# EAGLE board portal (EAGLE 9.6.2)
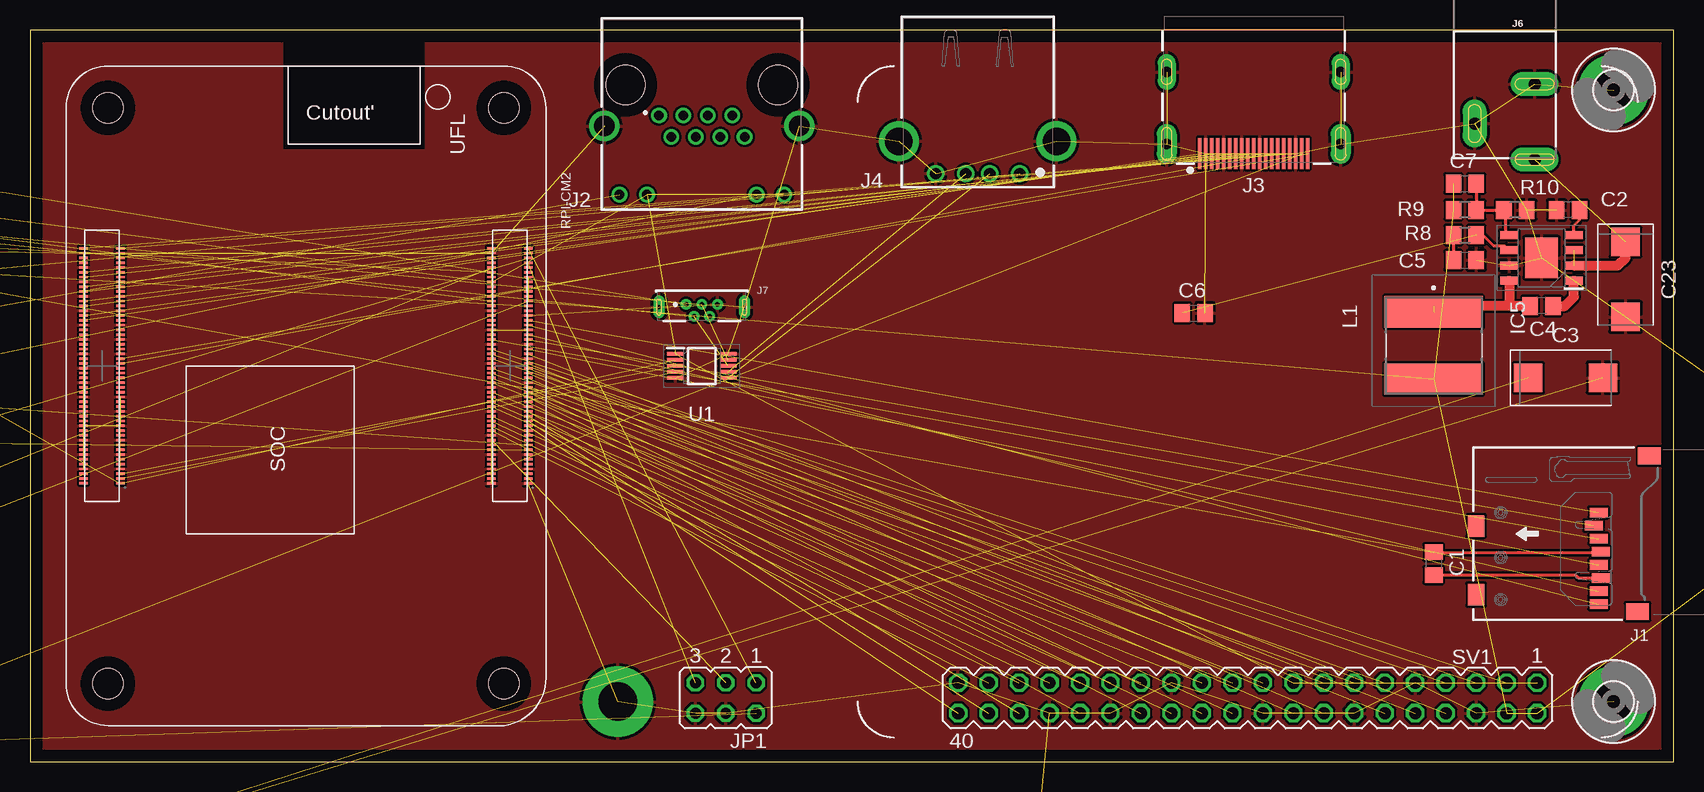
[diagram p0: board, top side]
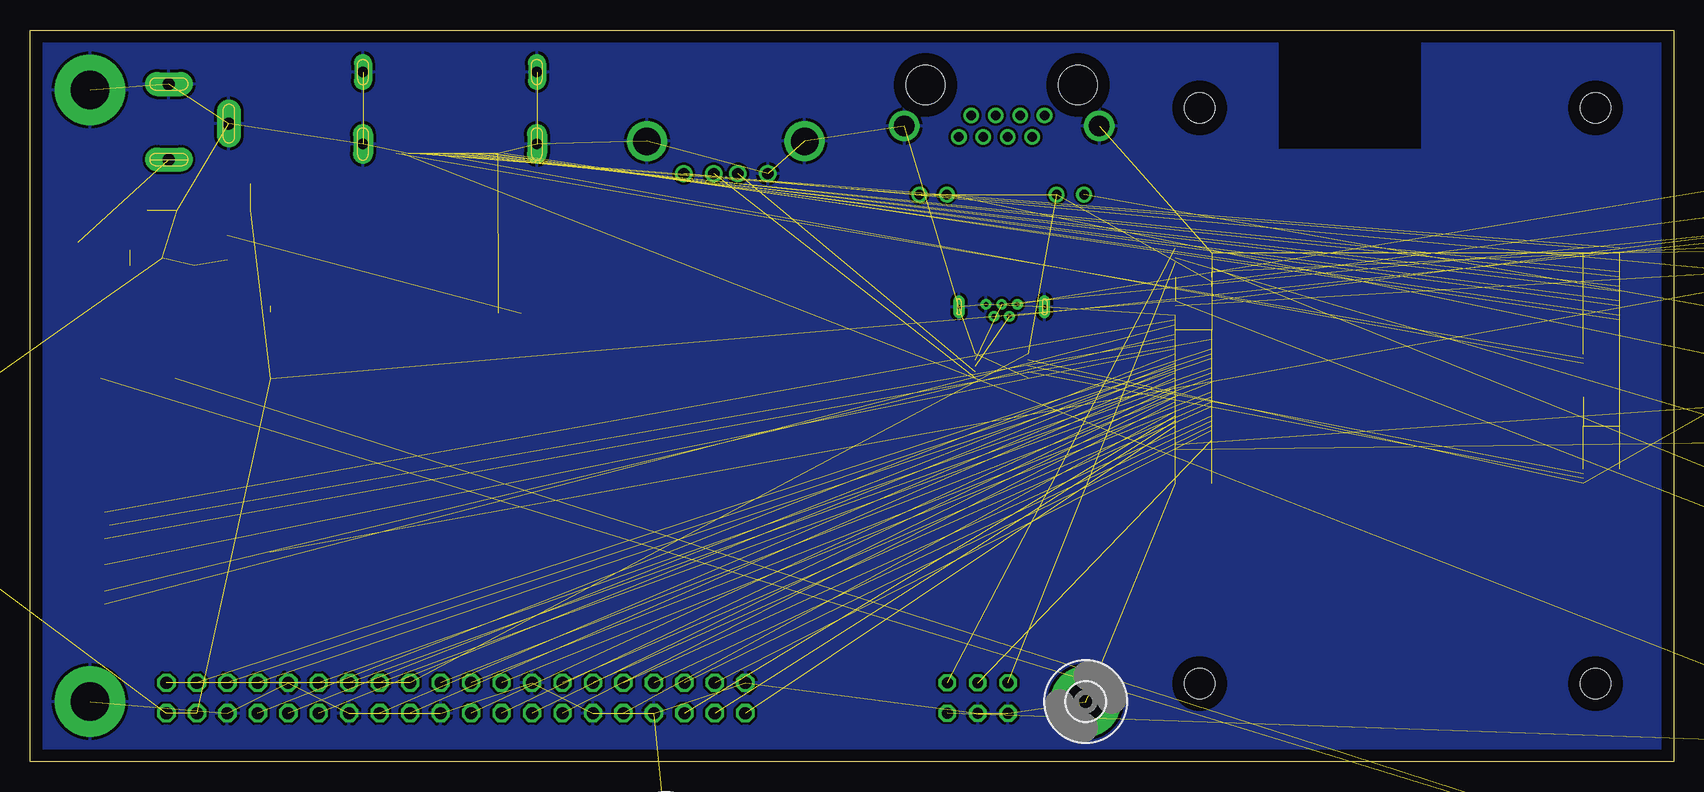
[diagram p1: board, bottom side, seen from below]

Size 137 x 61 mm. Coordinates in mm from the lower left corner, seen from the top.
Outline: 0,0 137,0 137,61 0,61 0,0
Copper layers (1*16): Top 0.035mm / dielectric 1.5mm / Bottom 0.035mm
Design rules "default *": minimum track width 8mil, minimum drill 0.35mm, track to track 8mil, track to pad 6mil, pad to pad 5mil, via to via 6mil, smd to smd 6mil, copper to edge 40mil, drill to drill 6mil, minimum pad ring 10mil, minimum via ring 8mil, stop-mask expansion 4mil, vias tented up to drill 0mil, thermal gap 10mil

## Footprints (pad centres in the part's own frame; a part is rotated, then mirrored left to right if it is on the bottom)
C0805 = smd 1.3 x 1.5: 1 -0.95,0; 2 0.95,0
CAPMP7343X310N = smd 2.368 x 2.404: 1 -3.121,0; 2 3.121,0
3,2-PAD = drill 3.2 pad 5.842: B3,2 0,0
SOT94P280X100-5N = smd 1.25 x 0.65: 1 -1.25,0.94; 2 -1.25,0; 3 -1.25,-0.94; 4 1.25,-0.94; 5 1.25,0.94
GHI-IC_SC70(TI-DCK) = smd 0.4 x 0.9: 1 0.65,1.1; 2 0,1.1; 3 -0.65,1.1; 4 -0.65,-1.1; 5 0.65,-1.1
DQA(R-PUSON-N10) = smd 0.3 x 0.55: 1 -1,-0.385; 2 -0.5,-0.385; 4 0.5,-0.385; 5 1,-0.385; 6 1,0.385; 7 0.5,0.385; 9 -0.5,0.385; 10 -1,0.385 | smd 0.4 x 0.55: 3 0,-0.385; 8 0,0.385
SOIC127P600X163-9N = smd 1.5 x 0.65: 1 -2.7,1.905; 2 -2.7,0.635; 3 -2.7,-0.635; 4 -2.7,-1.905; 5 2.7,-1.905; 6 2.7,-0.635; 7 2.7,0.635; 8 2.7,1.905 | smd 2.71 x 3.35: 9 0,0
SOT95P280X145-6N = smd 1.15 x 0.6: 1 -1.25,0.95; 2 -1.25,0; 3 -1.25,-0.95; 4 1.25,-0.95; 5 1.25,0; 6 1.25,0.95
A0R-JMP = smd 1.5 x 1.3: 1 0,1.7; 2 0,0; 3 0,-1.7
CON-SD-CARD_2908-05 = smd 0.8 x 1.5: 1 1.761,3.847; 2 0.669,4.253; 3 -0.423,3.847; 4 -1.515,3.644; 5 -2.607,3.847; 6 -3.7,3.644; 7 -4.792,3.847; 8 -5.884,3.847 | smd 1.397 x 1.905: GND@1 -6.5,0.6; GND@2 6.473,-0.389 | smd 1.803 x 1.397: GND@3 0.631,14.059; GND@4 -5.084,14.059
615008137421 = drill 0.8: 1 3.57,0.125; 2 2.55,1.905; 3 1.53,0.125; 4 0.51,1.905; 5 -0.51,0.125; 6 -1.53,1.905; 7 -2.55,0.125; 8 -3.57,1.905; 9 6.86,6.725; 10 4.57,6.725; 11 -4.57,6.725; 12 -6.86,6.725 | drill 1.7: S1 -8.125,1.015; S2 8.125,1.015 | hole 3.25: -6.35,-2.415; 6.35,-2.415
685119134923 = smd 0.28 x 2.6: 1 4.5,0; 2 4,0; 3 3.5,0; 4 3,0; 5 2.5,0; 6 2,0; 7 1.5,0; 8 1,0; 9 0.5,0; 10 0,0; 11 -0.5,0; 12 -1,0; 13 -1.5,0; 14 -2,0; 15 -2.5,0; 16 -3,0; 17 -3.5,0; 18 -4,0; 19 -4.5,0 | drill 0.9 pad 1.65 long: SHELL -7.25,-0.8; SHELL1 7.25,-0.8 | drill 0.9 pad 1.5 long: SHELL2 -7.25,-6.8; SHELL3 7.25,-6.8
61400416021 = drill 0.92: 1 -3.5,5.99; 2 -1,5.99; 3 1,5.99; 4 3.5,5.99 | drill 2.3: S1 -6.57,3.28; S2 6.57,3.28
POWER_JACK_SLOT = drill 1 pad 2 long: GND@1 2.58,7.5; GND@2 7.58,10.8; PWR 2.58,13.8
614105150721 = drill 0.4: 1 -1.3,0.125; 2 -0.65,-0.875; 3 0,0.125; 4 0.65,-0.875; 5 1.3,0.125 | drill 0.35 pad 0.97 long: S1 -3.575,-0.095; S2 3.575,-0.095
JP3Q = drill 0.914 octagon: 1 -2.54,-1.27; 2 -2.54,1.27; 3 0,-1.27; 4 0,1.27; 5 2.54,-1.27; 6 2.54,1.27
SRN80408R2Y = smd 2.6 x 8.2: 1 -2.8,0; 2 2.8,0
CHIP-LED0805 = smd 1.2 x 1.2: A 0,-1.05; C 0,1.05
R0805 = smd 1.3 x 1.5: 1 -0.95,0; 2 0.95,0
RPI-CM4 = smd 0.2 x 0.7: 1 34.8,38.54; 2 34.8,35.46; 3 34.4,38.54; 4 34.4,35.46; 5 34,38.54; 6 34,35.46; 7 33.6,38.54; 8 33.6,35.46; 9 33.2,38.54; 10 33.2,35.46; 11 32.8,38.54; 12 32.8,35.46; 13 32.4,38.54; 14 32.4,35.46; 15 32,38.54; 16 32,35.46; 17 31.6,38.54; 18 31.6,35.46; 19 31.2,38.54; 20 31.2,35.46; 21 30.8,38.54; 22 30.8,35.46; 23 30.4,38.54; 24 30.4,35.46; 25 30,38.54; 26 30,35.46; 27 29.6,38.54; 28 29.6,35.46; 29 29.2,38.54; 30 29.2,35.46; 31 28.8,38.54; 32 28.8,35.46; 33 28.4,38.54; 34 28.4,35.46; 35 28,38.54; 36 28,35.46; 37 27.6,38.54; 38 27.6,35.46; 39 27.2,38.54; 40 27.2,35.46; 41 26.8,38.54; 42 26.8,35.46; 43 26.4,38.54; 44 26.4,35.46; 45 26,38.54; 46 26,35.46; 47 25.6,38.54; 48 25.6,35.46; 49 25.2,38.54; 50 25.2,35.46; 51 24.8,38.54; 52 24.8,35.46; 53 24.4,38.54; 54 24.4,35.46; 55 24,38.54; 56 24,35.46; 57 23.6,38.54; 58 23.6,35.46; 59 23.2,38.54; 60 23.2,35.46; 61 22.8,38.54; 62 22.8,35.46; 63 22.4,38.54; 64 22.4,35.46; 65 22,38.54; 66 22,35.46; 67 21.6,38.54; 68 21.6,35.46; 69 21.2,38.54; 70 21.2,35.46; 71 20.8,38.54; 72 20.8,35.46; 73 20.4,38.54; 74 20.4,35.46; 75 20,38.54; 76 20,35.46; 77 19.6,38.54; 78 19.6,35.46; 79 19.2,38.54; 80 19.2,35.46; 81 18.8,38.54; 82 18.8,35.46; 83 18.4,38.54; 84 18.4,35.46; 85 18,38.54; 86 18,35.46; 87 17.6,38.54; 88 17.6,35.46; 89 17.2,38.54; 90 17.2,35.46; 91 16.8,38.54; 92 16.8,35.46; 93 16.4,38.54; 94 16.4,35.46; 95 16,38.54; 96 16,35.46; 97 15.6,38.54; 98 15.6,35.46; 99 15.2,38.54; 100 15.2,35.46; 101 34.8,4.54; 102 34.8,1.46; 103 34.4,4.54; 104 34.4,1.46; 105 34,4.54; 106 34,1.46; 107 33.6,4.54; 108 33.6,1.46; 109 33.2,4.54; 110 33.2,1.46; 111 32.8,4.54; 112 32.8,1.46; 113 32.4,4.54; 114 32.4,1.46; 115 32,4.54; 116 32,1.46; 117 31.6,4.54; 118 31.6,1.46; 119 31.2,4.54; 120 31.2,1.46; 121 30.8,4.54; 122 30.8,1.46; 123 30.4,4.54; 124 30.4,1.46; 125 30,4.54; 126 30,1.46; 127 29.6,4.54; 128 29.6,1.46; 129 29.2,4.54; 130 29.2,1.46; 131 28.8,4.54; 132 28.8,1.46; 133 28.4,4.54; 134 28.4,1.46; 135 28,4.54; 136 28,1.46; 137 27.6,4.54; 138 27.6,1.46; 139 27.2,4.54; 140 27.2,1.46; 141 26.8,4.54; 142 26.8,1.46; 143 26.4,4.54; 144 26.4,1.46; 145 26,4.54; 146 26,1.46; 147 25.6,4.54; 148 25.6,1.46; 149 25.2,4.54; 150 25.2,1.46; 151 24.8,4.54; 152 24.8,1.46; 153 24.4,4.54; 154 24.4,1.46; 155 24,4.54; 156 24,1.46; 157 23.6,4.54; 158 23.6,1.46; 159 23.2,4.54; 160 23.2,1.46; 161 22.8,4.54; 162 22.8,1.46; 163 22.4,4.54; 164 22.4,1.46; 165 22,4.54; 166 22,1.46; 167 21.6,4.54; 168 21.6,1.46; 169 21.2,4.54; 170 21.2,1.46; 171 20.8,4.54; 172 20.8,1.46; 173 20.4,4.54; 174 20.4,1.46; 175 20,4.54; 176 20,1.46; 177 19.6,4.54; 178 19.6,1.46; 179 19.2,4.54; 180 19.2,1.46; 181 18.8,4.54; 182 18.8,1.46; 183 18.4,4.54; 184 18.4,1.46; 185 18,4.54; 186 18,1.46; 187 17.6,4.54; 188 17.6,1.46; 189 17.2,4.54; 190 17.2,1.46; 191 16.8,4.54; 192 16.8,1.46; 193 16.4,4.54; 194 16.4,1.46; 195 16,4.54; 196 16,1.46; 197 15.6,4.54; 198 15.6,1.46; 199 15.2,4.54; 200 15.2,1.46 | hole 2.55: 3.5,3.5; 3.5,36.5; 51.5,36.5; 51.5,3.5
MA20-2 = drill 1.016 octagon: 1 -24.13,-1.27; 2 -24.13,1.27; 3 -21.59,-1.27; 4 -21.59,1.27; 5 -19.05,-1.27; 6 -19.05,1.27; 7 -16.51,-1.27; 8 -16.51,1.27; 9 -13.97,-1.27; 10 -13.97,1.27; 11 -11.43,-1.27; 12 -11.43,1.27; 13 -8.89,-1.27; 14 -8.89,1.27; 15 -6.35,-1.27; 16 -6.35,1.27; 17 -3.81,-1.27; 18 -3.81,1.27; 19 -1.27,-1.27; 20 -1.27,1.27; 21 1.27,-1.27; 22 1.27,1.27; 23 3.81,-1.27; 24 3.81,1.27; 25 6.35,-1.27; 26 6.35,1.27; 27 8.89,-1.27; 28 8.89,1.27; 29 11.43,-1.27; 30 11.43,1.27; 31 13.97,-1.27; 32 13.97,1.27; 33 16.51,-1.27; 34 16.51,1.27; 35 19.05,-1.27; 36 19.05,1.27; 37 21.59,-1.27; 38 21.59,1.27; 39 24.13,-1.27; 40 24.13,1.27
SOP50P490X110-10N = smd 1.4 x 0.3: 1 -2.2,1; 2 -2.2,0.5; 3 -2.2,0; 4 -2.2,-0.5; 5 -2.2,-1; 6 2.2,-1; 7 2.2,-0.5; 8 2.2,0; 9 2.2,0.5; 10 2.2,1

## Placement (x,y rotation side)
C1  10u  [C0805]  117,16.5 270 top
C2  10n  [C0805]  128.2,46 180 top
C3  10u 30v  [CAPMP7343X310N]  128,32 0 top
C4  100n  [C0805]  126,38 180 top
C5  2.7n  [C0805]  119.6,41.8 0 top
C6  33p  [C0805]  97,37.4 0 top
C7  33p  [C0805]  119.6,48.2 0 top
C8  22u  [C0805]  152,23 0 top  (outside the outline)
C9  22u  [C0805]  157,23 0 top  (outside the outline)
C10  22u  [C0805]  158,30 0 top  (outside the outline)
C11  10u  [C0805]  -73,28 0 top  (outside the outline)
C12  10u  [C0805]  -78,35 0 top  (outside the outline)
C13  10u  [C0805]  -73,35 0 top  (outside the outline)
C14  10u  [C0805]  -68,35 0 top  (outside the outline)
C15  100u  [CAPMP7343X310N]  -75,43 0 top  (outside the outline)
C16  10u  [C0805]  -78,28 0 top  (outside the outline)
C17  10u  [C0805]  -78,-18 0 top  (outside the outline)
C18  10u  [C0805]  -73,-18 0 top  (outside the outline)
C19  10u  [C0805]  -68,-18 0 top  (outside the outline)
C20  10u  [C0805]  -78,-25 0 top  (outside the outline)
C21  100u  [CAPMP7343X310N]  -75,-10 0 top  (outside the outline)
C22  10u  [C0805]  -73,-25 0 top  (outside the outline)
C23  10u 30v  [CAPMP7343X310N]  133,40.2 270 top
H1  MOUNT-PAD-ROUND3.2  [3,2-PAD]  84,-6 0 bottom  (outside the outline)
H2  MOUNT-PAD-ROUND3.2  [3,2-PAD]  49,5 0 bottom
H3  MOUNT-PAD-ROUND3.2  [3,2-PAD]  132,56 0 top
H4  MOUNT-PAD-ROUND3.2  [3,2-PAD]  132,5 0 top
IC1  RT9742GGJ5  [SOT94P280X100-5N]  -28,43 0 top  (outside the outline)
IC2  [GHI-IC_SC70(TI-DCK)]  -35,19 90 top  (outside the outline)
IC3  [GHI-IC_SC70(TI-DCK)]  -58,1 0 top  (outside the outline)
IC4  TPD4EUSB30DQAR  [DQA(R-PUSON-N10)]  -82,52 0 top  (outside the outline)
IC5  AP64501SP-13  [SOIC127P600X163-9N]  126,42 180 top
IC6  AP22653W6-7  [SOT95P280X145-6N]  -74,23 0 top  (outside the outline)
IC7  AP22653W6-7  [SOT95P280X145-6N]  -73,-31 0 top  (outside the outline)
IOREF  0R-JUMPA  [A0R-JMP]  -13,45 0 top  (outside the outline)
J1  CON-SD-CARD_MICROSD-2908-05  [CON-SD-CARD_2908-05]  134.6,19 90 top
J2  615008137421  [615008137421]  56,54 180 top
J3  [685119134923]  102,50.7 180 top
J4  61400416021  [61400416021]  79,55 180 top
J6  POWER_JACKSLT  [POWER_JACK_SLOT]  128,64 180 top
J7  614105150721  [614105150721]  56,38 0 top
JP1  [JP3Q]  58,5.3 180 top
L1  SRN8040-3R6Y  [SRN80408R2Y]  117,34.7 270 top
LED1  Green  [CHIP-LED0805]  -43,19 0 top  (outside the outline)
LED2  Red  [CHIP-LED0805]  -50,19 0 top  (outside the outline)
R1  12k  [R0805]  -37,39 0 top  (outside the outline)
R2  470  [R0805]  -37,32 0 top  (outside the outline)
R3  470  [R0805]  -37,27 0 top  (outside the outline)
R4  1k  [R0805]  -51,13 0 top  (outside the outline)
R5  1k  [R0805]  -51,8 0 top  (outside the outline)
R6  2.2k  [R0805]  -67,65 0 top  (outside the outline)
R7  2.2k  [R0805]  -67,58 0 top  (outside the outline)
R8  15.8k  [R0805]  119.6,43.9 0 top
R9  115k  [R0805]  119.6,46 180 top
R10  22.1k  [R0805]  123.8,46 180 top
R11  36k  [R0805]  -68,44 0 top  (outside the outline)
R12  36k  [R0805]  -68,-8 0 top  (outside the outline)
RPI-CM2  RPI-CM4  [RPI-CM4]  3,58 270 top
SV1  [MA20-2]  101.5,5.3 180 top
U1  FSUSB42MUX  [SOP50P490X110-10N]  56,33 0 top

## Library data of the parts
C1 C2 C4-C14 C16-C20 C22 = rcl; SPICEPREFIX: C
C3 C15 C21 C23 = Capacitor; CATEGORY: Capacitor
H1-H4 = holes
IC1 = RT9742GGJ5; DESCRIPTION: POWER LOAD SWITCH, HIGH SIDE, TSOT-23-5; Power Load Switch Type:High Side; Input Voltage:6V; Current Limit:1.1A; On State Resistance:0.07ohm; Distribution Switch Case Style:TSOT-23; No. of Pins:5Pins; Thermal Protection:Yes; On / RoHS Compliant: Yes; HEIGHT: 1mm; MANUFACTURER_NAME: RICHTEK; MANUFACTURER_PART_NUMBER: RT9742GGJ5
IC2 IC3 = BeagleBone_Black_Wireless
IC4 = TPD4EUSB30DQAR; ARROW_PART_NUMBER: TPD4EUSB30DQAR; ARROW_PRICE-STOCK: https://www.arrow.com/en/products/tpd4eusb30dqar/texas-instruments; DESCRIPTION: Texas Instruments TPD4EUSB30DQAR, USB Controller, 6Gbit/s, USB 3.0, 10-Pin SON; HEIGHT: mm; MANUFACTURER_NAME: Texas Instruments; MANUFACTURER_PART_NUMBER: TPD4EUSB30DQAR; MOUSER_PART_NUMBER: 595-TPD4EUSB30DQAR; MOUSER_PRICE-STOCK: https://www.mouser.co.uk/ProductDetail/Texas-Instruments/TPD4EUSB30DQAR/?qs=Ze4%2FuFuz19JpY4uqYOLMbQ%3D%3D
IC5 = AP64501SP-13; ARROW_PART_NUMBER: AP64501SP-13; ARROW_PRICE-STOCK: https://www.arrow.com/en/products/ap64501sp-13/diodes-incorporated; DESCRIPTION: Conv DC-DC 3.8V to 40V Synchronous Step Down Single-Out 0.8V to 39V 5A 8-Pin SO EP T/R; HEIGHT: 1.63mm; MANUFACTURER_NAME: Diodes Inc.; MANUFACTURER_PART_NUMBER: AP64501SP-13; MOUSER_PART_NUMBER: 621-AP64501SP-13; MOUSER_PRICE-STOCK: https://www.mouser.co.uk/ProductDetail/Diodes-Incorporated/AP64501SP-13/?qs=P1JMDcb91o7FS0GU%252BW7TIQ%3D%3D
IC6 IC7 = AP22653W6-7; DESCRIPTION: Power Switch ICs - Power Distribution 1-Ch Precision Curr-Limit Load SW; HEIGHT: 1.45mm; MANUFACTURER_NAME: Diodes Inc.; MANUFACTURER_PART_NUMBER: AP22653W6-7; MOUSER_PART_NUMBER: 621-AP22653W6-7; MOUSER_PRICE-STOCK: https://www.mouser.co.uk/ProductDetail/Diodes-Incorporated/AP22653W6-7/?qs=rkhjVJ6%2F3ELFrpB7eThLLg%3D%3D
IOREF = jump-0r-smd
J1 = 52101-101-REV-A_v16
J2 = Wurth_Connectors_WR-MJ; DATASHEET-URL: https://www.we-online.com/catalog/datasheet/615008137421.pdf; LED: yellow-green; MOUNT: THT; PART-NUMBER: 615008137421; TYPE: Horizontal; XPXC: 8P8C
J3 = Wurth_Connectors_WR-HDMI; DATASHEET-URL: https://www.we-online.com/catalog/datasheet/685119134923.pdf; GERDER: Receptacle; MOUNT: SMT; PART-NUMBER: 685119134923; PINS: 19; RATED-CURRENT: 0.5A; TYPE: Horizontal; WORKING-VOLTAGE: 40VDC
J4 = Wurth_Connectors_WR-USB; APPLICATION: USB 2.0; DATASHEET-URL: https://www.we-online.com/catalog/datasheet/61400416021.pdf; GERDER: Receptacle; INTERFACE-TYPE: Type A; IR1: 1.5A; MOUNT: THT; PACKAGING: Tray; PART-NUMBER: 61400416021; PINS: 4; TYPE: Horizontal; WORKING-VOLTAGE: 30V(AC)
J6 = SparkFun-Connectors; PROD_ID: PRT-00119
J7 = Wurth_Connectors_WR-USB; APPLICATION: Micro USB 2.0; DATASHEET-URL: https://www.we-online.com/catalog/datasheet/614105150721.pdf; GERDER: Receptacle; INTERFACE-TYPE: Type B; IR1: 1.8A; MOUNT: THT; PACKAGING: Tape and Reel; PART-NUMBER: 614105150721; PINS: 5; TYPE: Vertical; WORKING-VOLTAGE: 30V(AC)
JP1 = jumper
L1 = SRN8040-3R6Y; ARROW_PART_NUMBER: SRN8040-3R6Y; ARROW_PRICE-STOCK: https://www.arrow.com/en/products/srn8040-3r6y/bourns; DESCRIPTION: Bourns SRN8040 Series Shielded Wire-wound SMD Inductor with a Ferrite Core, 3.6 uH +/-30% 5.3A Idc; HEIGHT: 4mm; MANUFACTURER_NAME: Bourns; MANUFACTURER_PART_NUMBER: SRN8040-3R6Y; MOUSER_PART_NUMBER: 652-SRN8040-3R6Y; MOUSER_PRICE-STOCK: https://www.mouser.com/Search/Refine.aspx?Keyword=652-SRN8040-3R6Y
LED1 LED2 = led
R1 = resistor
R2-R12 = rcl; SPICEPREFIX: R
RPI-CM2 = RPI-CM4
SV1 = con-lstb; OC_FARNELL: unknown; OC_NEWARK: unknown
U1 = FSUSB42MUX; ARROW_PART_NUMBER: FSUSB42MUX; ARROW_PRICE-STOCK: https://www.arrow.com/en/products/fsusb42mux/on-semiconductor; DESCRIPTION: ON SEMICONDUCTOR - FSUSB42MUX - USB SWITCH, DUAL, DPDT, MSOP-10; HEIGHT: 1.1mm; MANUFACTURER_NAME: ON Semiconductor; MANUFACTURER_PART_NUMBER: FSUSB42MUX; MOUSER_PART_NUMBER: 512-FSUSB42MUX; MOUSER_PRICE-STOCK: https://www.mouser.co.uk/ProductDetail/ON-Semiconductor-Fairchild/FSUSB42MUX?qs=yA6kp8fx8Y59RAD4iJDRWg%3D%3D

## Nets
1V8: IOREF.3 RPI-CM2.88 RPI-CM2.90
+3V3: IC1.5 IC2.5 IOREF.1 J2.10 J2.12 LED1.A LED2.A R1.1 RPI-CM2.84 RPI-CM2.86 SV1.1 SV1.17 U1.1
+5V: C3.1 C7.1 C8.1 C9.1 C10.1 C16.1 C22.1 IC3.5 IC6.1 IC7.1 IC7.3 L1.2 R9.2 RPI-CM2.77 RPI-CM2.79 RPI-CM2.81 RPI-CM2.83 RPI-CM2.85 RPI-CM2.87 SV1.2 SV1.4
ACT_LED: R4.1
EEPROM_WP: JP1.3 RPI-CM2.20
ETH_LEDG: R2.1 RPI-CM2.17
ETH_LEDY: R3.1 RPI-CM2.15
GLOBAL_EN: JP1.1 RPI-CM2.99
GND: C2.2 C3.2 C5.2 C6.2 C8.2 C9.2 C10.2 C11.2 C12.2 C13.2 C14.2 C15.2 C16.2 C17.2 C18.2 C19.2 C20.2 C21.2 C22.2 C23.2 H1.B3,2 H2.B3,2 H3.B3,2 H4.B3,2 IC1.2 IC2.3 IC3.3 IC4.3 IC4.8 IC5.7 IC5.9 IC6.2 IC7.2 J2.S1 J2.S2 J3.2 J3.5 J3.8 J3.11 J3.17 J3.SHELL J3.SHELL1 J3.SHELL2 J3.SHELL3 J4.4 J4.S1 J4.S2 J6.GND@1 J6.GND@2 J7.5 J7.S1 J7.S2 JP1.4 JP1.6 R7.1 R10.1 R11.1 R12.1 RPI-CM2.1 RPI-CM2.2 RPI-CM2.7 RPI-CM2.8 RPI-CM2.13 RPI-CM2.14 RPI-CM2.22 RPI-CM2.23 RPI-CM2.32 RPI-CM2.33 RPI-CM2.42 RPI-CM2.43 RPI-CM2.52 RPI-CM2.53 RPI-CM2.59 RPI-CM2.60 RPI-CM2.65 RPI-CM2.66 RPI-CM2.71 RPI-CM2.74 RPI-CM2.98 RPI-CM2.107 RPI-CM2.108 RPI-CM2.113 RPI-CM2.114 RPI-CM2.119 RPI-CM2.120 RPI-CM2.125 RPI-CM2.126 RPI-CM2.131 RPI-CM2.132 RPI-CM2.137 RPI-CM2.138 RPI-CM2.144 RPI-CM2.150 RPI-CM2.155 RPI-CM2.156 RPI-CM2.161 RPI-CM2.162 RPI-CM2.167 RPI-CM2.168 RPI-CM2.173 RPI-CM2.174 RPI-CM2.179 RPI-CM2.180 RPI-CM2.185 RPI-CM2.186 RPI-CM2.191 RPI-CM2.192 RPI-CM2.197 RPI-CM2.198 SV1.6 SV1.9 SV1.14 SV1.20 SV1.25 SV1.30 SV1.34 SV1.39 U1.5 U1.10
GPIO2: RPI-CM2.58 SV1.3
GPIO3: RPI-CM2.56 SV1.5
GPIO4: RPI-CM2.54 SV1.7
GPIO5: RPI-CM2.34 SV1.29
GPIO6: RPI-CM2.30 SV1.31
GPIO7: RPI-CM2.37 SV1.26
GPIO8: RPI-CM2.39 SV1.24
GPIO9: RPI-CM2.40 SV1.21
GPIO10: RPI-CM2.44 SV1.19
GPIO11: RPI-CM2.38 SV1.23
GPIO12: RPI-CM2.31 SV1.32
GPIO13: RPI-CM2.28 SV1.33
GPIO14: RPI-CM2.55 SV1.8
GPIO15: RPI-CM2.51 SV1.10
GPIO16: RPI-CM2.29 SV1.36
GPIO17: RPI-CM2.50 SV1.11
GPIO18: RPI-CM2.49 SV1.12
GPIO19: RPI-CM2.26 SV1.35
GPIO20: RPI-CM2.27 SV1.38
GPIO21: RPI-CM2.25 SV1.40
GPIO22: RPI-CM2.46 SV1.15
GPIO23: RPI-CM2.47 SV1.16
GPIO24: RPI-CM2.45 SV1.18
GPIO25: RPI-CM2.41 SV1.22
GPIO26: RPI-CM2.24 SV1.37
GPIO27: RPI-CM2.48 SV1.13
HDMI_5V: C17.1 C18.1 C19.1 C20.1 C21.1 IC7.6 J3.18
ID_SC: RPI-CM2.35 SV1.28
ID_SD: RPI-CM2.36 SV1.27
LED_ACT: RPI-CM2.21
N$1: J2.9 R2.2
N$2: IOREF.2 RPI-CM2.78
N$3: J2.11 R3.2
N$4: IC6.5 R11.2
N$5: LED1.C R4.2
N$6: C1.2 J1.6
N$7: LED2.C R5.2
N$8: IC2.4 R5.1
N$9: RPI-CM2.103 U1.4
N$10: RPI-CM2.105 U1.3
N$11: IC4.1 J7.3 U1.9
N$12: IC3.4 JP1.2
N$13: IC4.2 J7.2 U1.8
N$14: J4.3 U1.7
N$15: J4.2 U1.6
N$16: R6.2 RPI-CM2.101 U1.2
N$17: J3.19 RPI-CM2.153
N$18: IC7.5 R12.2
N$19: J3.13 RPI-CM2.151
N$20: J3.15 RPI-CM2.200
N$21: J3.16 RPI-CM2.199
N$22: J3.3 RPI-CM2.172
N$23: J3.10 RPI-CM2.188
N$24: J3.6 RPI-CM2.178
N$25: J3.7 RPI-CM2.182
N$26: J3.9 RPI-CM2.184
N$27: J3.4 RPI-CM2.176
N$28: J3.12 RPI-CM2.190
N$29: J3.1 RPI-CM2.170
N$30: C23.1 IC5.2 IC5.3 J6.PWR
N$31: C4.1 IC5.1
N$32: C2.1 IC5.4
N$33: C4.2 IC5.8 L1.1
N$34: C6.1 IC5.6 R8.2
N$35: C5.1 R8.1
N$36: C7.2 IC5.5 R9.1 R10.2
PWR_LED: IC2.2 RPI-CM2.95
RPIBOOT: JP1.5 RPI-CM2.93
RUN_PG: IC3.2 RPI-CM2.92
SD_CLK: J1.5 RPI-CM2.57
SD_CMD: J1.3 RPI-CM2.62
SD_DAT0: J1.7 RPI-CM2.63
SD_DAT1: J1.8 RPI-CM2.67
SD_DAT2: J1.1 RPI-CM2.69
SD_DAT3: J1.2 RPI-CM2.61
SD_PWR: C1.1 IC1.1 J1.4
SD_PWR_ON: IC1.4 R1.2 RPI-CM2.75
VBUS: C11.1 C12.1 C13.1 C14.1 C15.1 IC6.6 J4.1
VBUS_OTG: IC6.3 J7.1 R6.1 R7.2

## Tracks (layer width: path | path; a pad name or v marks a point on that pad's centre or on a via)
1V8  (2 unrouted)
+3V3  (12 unrouted)
+5V  (20 unrouted)
EEPROM_WP  (1 unrouted)
ETH_LEDG  (1 unrouted)
ETH_LEDY  (1 unrouted)
GLOBAL_EN  (1 unrouted)
GND  (118 unrouted)
  pour Top: 21,61 21,51 33,51 33,61 137,61 137,0 0,0 0,61
  pour Bottom: 21,61 21,51 33,51 33,61 137,61 137,0 0,0 0,61
GPIO2  (1 unrouted)
GPIO3  (1 unrouted)
GPIO4  (1 unrouted)
GPIO5  (1 unrouted)
GPIO6  (1 unrouted)
GPIO7  (1 unrouted)
GPIO8  (1 unrouted)
GPIO9  (1 unrouted)
GPIO10  (1 unrouted)
GPIO11  (1 unrouted)
GPIO12  (1 unrouted)
GPIO13  (1 unrouted)
GPIO14  (1 unrouted)
GPIO15  (1 unrouted)
GPIO16  (1 unrouted)
GPIO17  (1 unrouted)
GPIO18  (1 unrouted)
GPIO19  (1 unrouted)
GPIO20  (1 unrouted)
GPIO21  (1 unrouted)
GPIO22  (1 unrouted)
GPIO23  (1 unrouted)
GPIO24  (1 unrouted)
GPIO25  (1 unrouted)
GPIO26  (1 unrouted)
GPIO27  (1 unrouted)
HDMI_5V  (6 unrouted)
ID_SC  (1 unrouted)
ID_SD  (1 unrouted)
N$1  (1 unrouted)
N$2  (1 unrouted)
N$3  (1 unrouted)
N$4  (1 unrouted)
N$5  (1 unrouted)
N$6
  Top 0.254: C1.2 128.85,15.55 129.1,15.3 J1.6 | J1.6
N$7  (1 unrouted)
N$8  (1 unrouted)
N$9  (1 unrouted)
N$10  (1 unrouted)
N$11  (2 unrouted)
N$12  (1 unrouted)
N$13  (2 unrouted)
N$14  (1 unrouted)
N$15  (1 unrouted)
N$16  (2 unrouted)
N$17  (1 unrouted)
N$18  (1 unrouted)
N$19  (1 unrouted)
N$20  (1 unrouted)
N$21  (1 unrouted)
N$22  (1 unrouted)
N$23  (1 unrouted)
N$24  (1 unrouted)
N$25  (1 unrouted)
N$26  (1 unrouted)
N$27  (1 unrouted)
N$28  (1 unrouted)
N$29  (1 unrouted)
N$30  (2 unrouted)
  Top 0.813: IC5.2 132.37,41.37 133,42 C23.1
N$31
  Top 0.813: C4.1 127.95,38 128.7,38.75 IC5.1
N$32
  Top 0.254: IC5.4 128.7,44.7 129.15,45.15 C2.1
N$33  (1 unrouted)
  Top 0.813: C4.2 123.3,38 | 123.3,38 117,38 | IC5.8 123.3,38
N$34  (1 unrouted)
  Top 0.254: 123.27,42.6 IC5.6 122.94,43 122,43 121.1,43.9 R8.2
N$35
  Top 0.254: R8.1 C5.1
N$36
  Top 0.254: IC5.5 123,44.2 123,45.85 R10.2 R9.1 C7.2
PWR_LED  (1 unrouted)
RPIBOOT  (1 unrouted)
RUN_PG  (1 unrouted)
SD_CLK  (1 unrouted)
SD_CMD  (1 unrouted)
SD_DAT0  (1 unrouted)
SD_DAT1  (1 unrouted)
SD_DAT2  (1 unrouted)
SD_DAT3  (1 unrouted)
SD_PWR  (1 unrouted)
  Top 0.254: C1.1 130.92,17.45 J1.4
SD_PWR_ON  (2 unrouted)
VBUS  (6 unrouted)
VBUS_OTG  (3 unrouted)